# EAGLE board design (EAGLE 9.7.0)

Size 144.15 x 148.84 mm. Coordinates in mm from the lower left corner, seen from the top.
Outline: 0,0 144.15,0 144.15,148.84 0,148.84 0,0
Copper layers (1*16): Top 0.035mm / dielectric 1.5mm / Bottom 0.035mm
Design rules "default": minimum track width 6mil, minimum drill 0.35mm, track to track 6mil, track to pad 6mil, pad to pad 6mil, via to via 6mil, smd to smd 6mil, copper to edge 40mil, drill to drill 6mil, minimum pad ring 10mil, minimum via ring 8mil, stop-mask expansion 4mil, vias tented up to drill 0mil, thermal gap 10mil

## Footprints (pad centres in the part's own frame; a part is rotated, then mirrored left to right if it is on the bottom)
LEDRD254W60D565H860B_Y = drill 0.981 pad 1.581: 1 -1.27,0; 2 1.27,0
LEDRD254W60D565H860B_G = drill 0.981 pad 1.581: 1 -1.27,0; 2 1.27,0
LEDRD254W60D565H860B = drill 0.981 pad 1.581: 1 -1.27,0; 2 1.27,0
LEDRD254W60D565H860B_B = drill 0.981 pad 1.581: 1 -1.27,0; 2 1.27,0
RESAD1016W63L850D250B = drill 0.83 pad 1.43: 1 -5.08,0; 2 5.08,0
HA-06-SM065 = drill 1 pad 1.676: 1 -2.54,-2.54; 2 0,2.54; 3 2.54,-2.54
SWITCH-MOMENTARY-PTH-6.5MM = drill 1.016 pad 1.88: 1 -3.251,2.261; 2 3.251,2.261; 3 -3.251,-2.261; 4 3.251,-2.261
ARDUINO-UNO-R3-SHIELD = drill 1.016 pad 1.88: 3.3V 24.13,-2.54; 5V 24.13,0; A0 24.13,12.7; A1 24.13,15.24; A2 24.13,17.78; A3 24.13,20.32; A4 24.13,22.86; A5 24.13,25.4; AREF -24.13,-13.97; D2 -24.13,20.32; D3 -24.13,17.78; D4 -24.13,15.24; D5 -24.13,12.7; D6 -24.13,10.16; D7 -24.13,7.62; D8 -24.13,3.81; D9 -24.13,1.27; D10 -24.13,-1.27; D11 -24.13,-3.81; D12 -24.13,-6.35; D13 -24.13,-8.89; GND@0 24.13,2.54; GND@1 24.13,5.08; GND@2 -24.13,-11.43; IOREF 24.13,-7.62; NC 24.13,-10.16; RES 24.13,-5.08; RX -24.13,25.4; SCL -24.13,-19.05; SDA -24.13,-16.51; TX -24.13,22.86; VIN 24.13,7.62

## Placement (x,y rotation side)
DELEVATOR_DOWN1  YELLOW  [LEDRD254W60D565H860B_Y]  65.43,39.45 180 top
DELEVATOR_UP  GREEN  [LEDRD254W60D565H860B_G]  70.51,39.45 180 top
DEMERGENCY_STOP_LED  RED  [LEDRD254W60D565H860B]  67.97,21.67 180 top
DFLOOR_1_LED  BLUE  [LEDRD254W60D565H860B_B]  90.83,39.45 180 top
DFLOOR_2_LED  BLUE  [LEDRD254W60D565H860B_B]  85.75,39.45 180 top
DFLOOR_3_LED  BLUE  [LEDRD254W60D565H860B_B]  80.67,39.45 180 top
DOVERRIDE_LED  RED  [LEDRD254W60D565H860B]  73.05,21.67 180 top
R1  590  [RESAD1016W63L850D250B]  66.7,34.37 90 top
R2  590  [RESAD1016W63L850D250B]  71.78,34.37 90 top
R3  590  [RESAD1016W63L850D250B]  81.94,34.37 90 top
R4  590  [RESAD1016W63L850D250B]  87.02,34.37 90 top
R5  10M  [RESAD1016W63L850D250B]  92.1,34.37 90 top
R6  10k  [RESAD1016W63L850D250B]  102.26,8.97 90 top
R7  10k  [RESAD1016W63L850D250B]  109.88,8.97 90 top
R8  10k  [RESAD1016W63L850D250B]  117.5,8.97 90 top
R9  10k  [RESAD1016W63L850D250B]  130.2,8.97 90 top
R10  10k  [RESAD1016W63L850D250B]  137.82,8.97 90 top
R11  590  [RESAD1016W63L850D250B]  69.24,16.59 90 top
R12  590  [RESAD1016W63L850D250B]  74.32,16.59 90 top
RPOTWEIGHT_SENSOR  250k  [HA-06-SM065]  7.05,113.79 0 top
SEMERGENCY_STOP_BTN  SWITCH_MOMENTARY  [SWITCH-MOMENTARY-PTH-6.5MM]  127.66,25.48 90 top
SFLOOR_1_BTN  SWITCH_MOMENTARY  [SWITCH-MOMENTARY-PTH-6.5MM]  114.96,25.48 90 top
SFLOOR_2_BTN  SWITCH_MOMENTARY  [SWITCH-MOMENTARY-PTH-6.5MM]  107.34,25.48 90 top
SFLOOR_3_BTN1  SWITCH_MOMENTARY  [SWITCH-MOMENTARY-PTH-6.5MM]  99.72,25.48 90 top
SOVERRIDE_BTN  SWITCH_MOMENTARY  [SWITCH-MOMENTARY-PTH-6.5MM]  135.28,25.48 90 top
UCONTROLLER  ARDUINO-UNO-R3-SHIELD  [ARDUINO-UNO-R3-SHIELD]  93.45,100.96 180 top

## Library data of the parts
DELEVATOR_DOWN1 = Tinkercad; CATEGORY: Opto-Electronic; SUB-CATEGORY: LED; VALUE: LED_YELLOW
DELEVATOR_UP = Tinkercad; CATEGORY: Opto-Electronic; SUB-CATEGORY: LED; VALUE: LED_GREEN
DEMERGENCY_STOP_LED DOVERRIDE_LED = Tinkercad; CATEGORY: Opto-Electronic; SUB-CATEGORY: LED; VALUE: LED_RED
DFLOOR_1_LED DFLOOR_2_LED DFLOOR_3_LED = Tinkercad; CATEGORY: Opto-Electronic; SUB-CATEGORY: LED; VALUE: LED_BLUE
R1-R12 RPOTWEIGHT_SENSOR SEMERGENCY_STOP_BTN SFLOOR_1_BTN SFLOOR_2_BTN SFLOOR_3_BTN1 SOVERRIDE_BTN UCONTROLLER = Tinkercad

## Nets
UCONTROLLER_5V: RPOTWEIGHT_SENSOR.1 SEMERGENCY_STOP_BTN.1 SEMERGENCY_STOP_BTN.2 SFLOOR_1_BTN.1 SFLOOR_1_BTN.2 SFLOOR_2_BTN.1 SFLOOR_2_BTN.2 SFLOOR_3_BTN1.1 SFLOOR_3_BTN1.2 SOVERRIDE_BTN.1 SOVERRIDE_BTN.2 UCONTROLLER.5V
UCONTROLLER_A0: RPOTWEIGHT_SENSOR.2 UCONTROLLER.A0
UCONTROLLER_D2: DFLOOR_1_LED.1 R5.1 R5.2 UCONTROLLER.D2
UCONTROLLER_D3: DFLOOR_2_LED.1 R4.1 R4.2 UCONTROLLER.D3
UCONTROLLER_D4: DFLOOR_3_LED.1 R3.1 R3.2 UCONTROLLER.D4
UCONTROLLER_D5: DELEVATOR_UP.1 R2.1 R2.2 UCONTROLLER.D5
UCONTROLLER_D6: DELEVATOR_DOWN1.1 R1.1 R1.2 UCONTROLLER.D6
UCONTROLLER_D7: R8.2 SFLOOR_1_BTN.3 SFLOOR_1_BTN.4 UCONTROLLER.D7
UCONTROLLER_D8: R7.2 SFLOOR_2_BTN.3 SFLOOR_2_BTN.4 UCONTROLLER.D8
UCONTROLLER_D9: R6.2 SFLOOR_3_BTN1.3 SFLOOR_3_BTN1.4 UCONTROLLER.D9
UCONTROLLER_D10: R9.2 SEMERGENCY_STOP_BTN.3 SEMERGENCY_STOP_BTN.4 UCONTROLLER.D10
UCONTROLLER_D11: R10.2 SOVERRIDE_BTN.3 SOVERRIDE_BTN.4 UCONTROLLER.D11
UCONTROLLER_D12: DEMERGENCY_STOP_LED.1 R11.1 R11.2 UCONTROLLER.D12
UCONTROLLER_D13: DOVERRIDE_LED.1 R12.1 R12.2 UCONTROLLER.D13
UCONTROLLER_GND: DELEVATOR_DOWN1.2 DELEVATOR_UP.2 DEMERGENCY_STOP_LED.2 DFLOOR_1_LED.2 DFLOOR_2_LED.2 DFLOOR_3_LED.2 DOVERRIDE_LED.2 R6.1 R7.1 R8.1 R9.1 R10.1 RPOTWEIGHT_SENSOR.3 UCONTROLLER.GND@0 UCONTROLLER.GND@1 UCONTROLLER.GND@2

## Tracks (layer width: path | path; a pad name or v marks a point on that pad's centre or on a via)
UCONTROLLER_5V  (11 unrouted)
UCONTROLLER_A0  (1 unrouted)
UCONTROLLER_D2  (3 unrouted)
UCONTROLLER_D3  (3 unrouted)
UCONTROLLER_D4  (3 unrouted)
UCONTROLLER_D5  (3 unrouted)
UCONTROLLER_D6  (3 unrouted)
UCONTROLLER_D7  (3 unrouted)
UCONTROLLER_D8  (3 unrouted)
UCONTROLLER_D9  (3 unrouted)
UCONTROLLER_D10  (3 unrouted)
UCONTROLLER_D11  (3 unrouted)
UCONTROLLER_D12  (3 unrouted)
UCONTROLLER_D13  (3 unrouted)
UCONTROLLER_GND  (15 unrouted)